# Altium PCB Earpth.PcbDoc
Units mm, origin at the board's own origin, x right, y up, seen from the top; angles counter-clockwise.
Board outline 304.55 x 254.25 mm, 2 copper layers (TopLayer, BottomLayer); 6 components, 2 nets, 96 pads, 12 vias.
Unrouted connection lines stored in the file: 4.
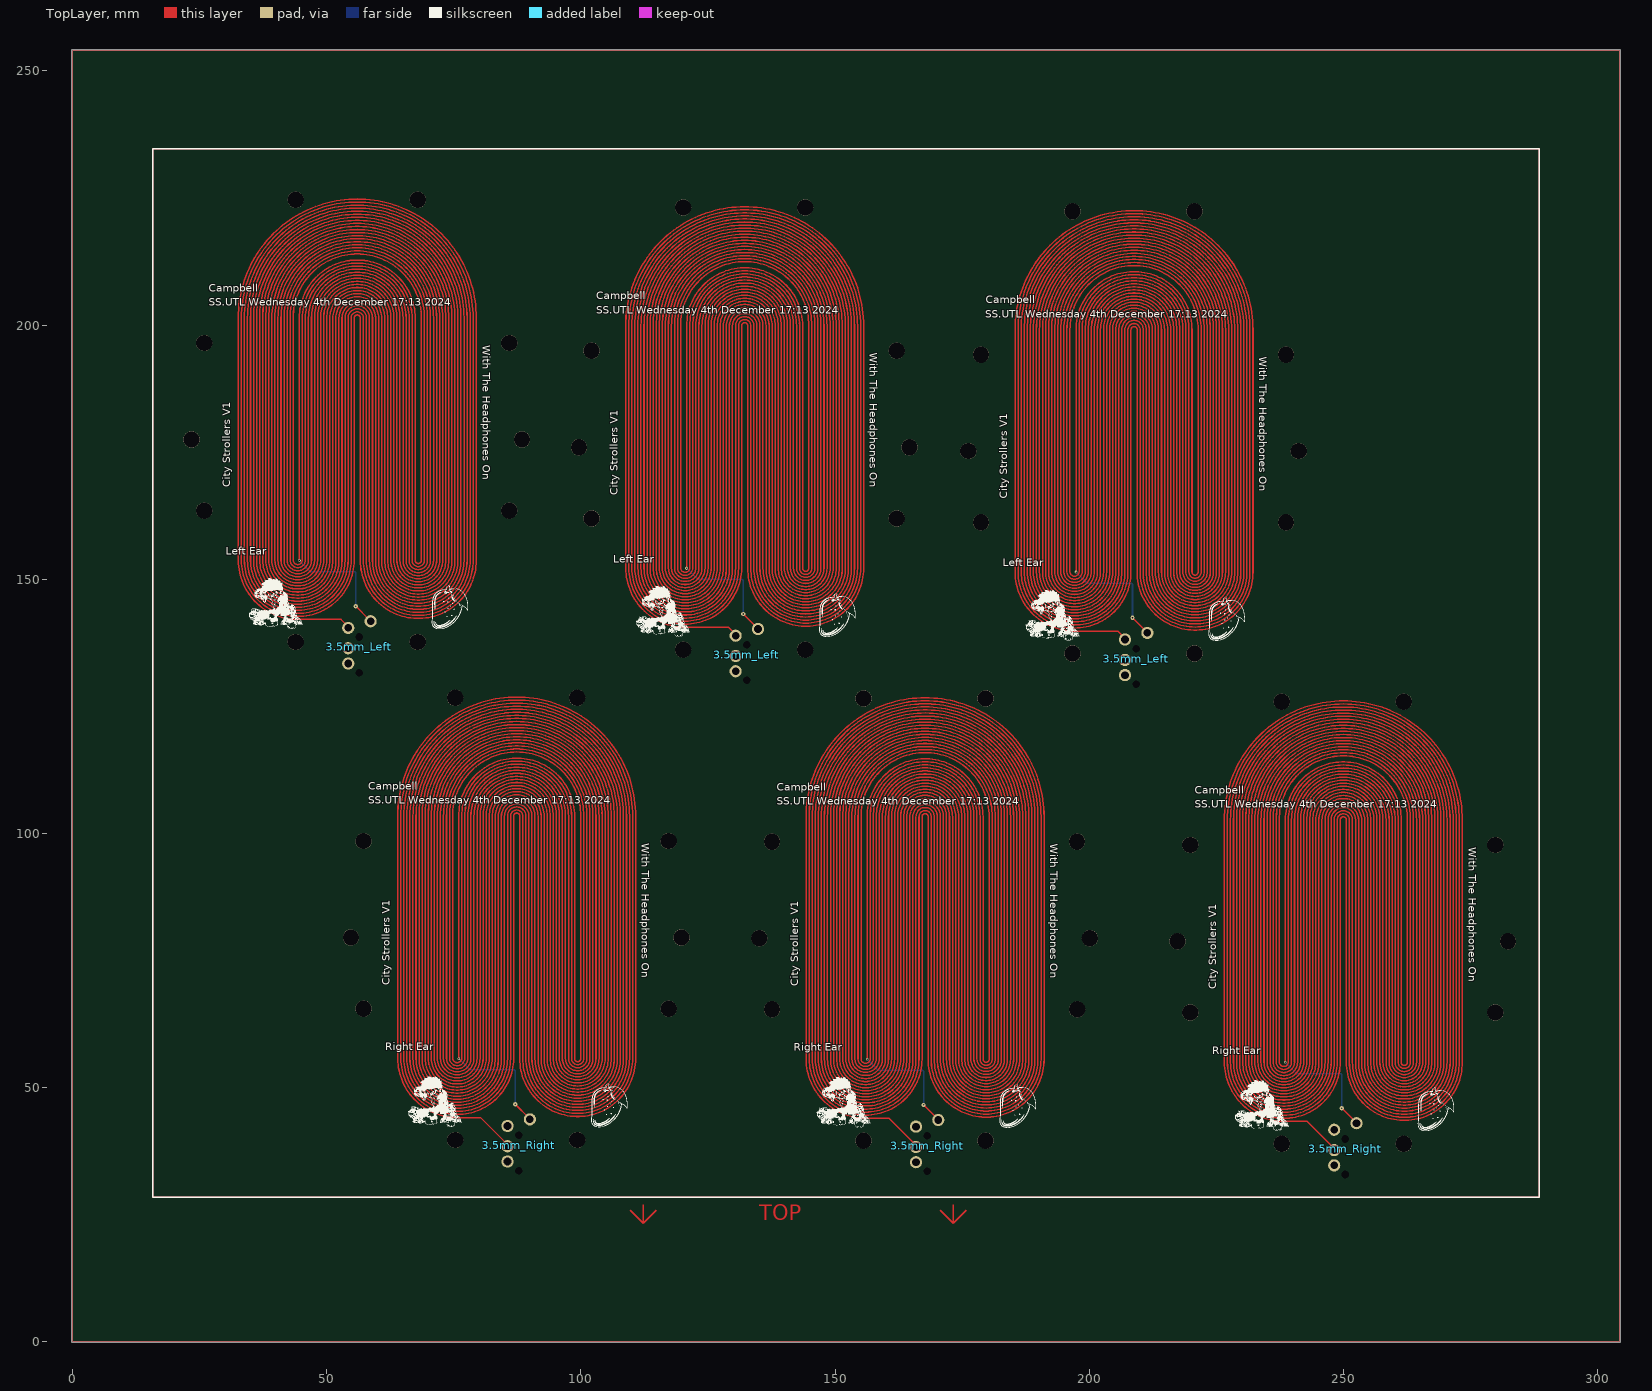
[diagram p0: TopLayer view]
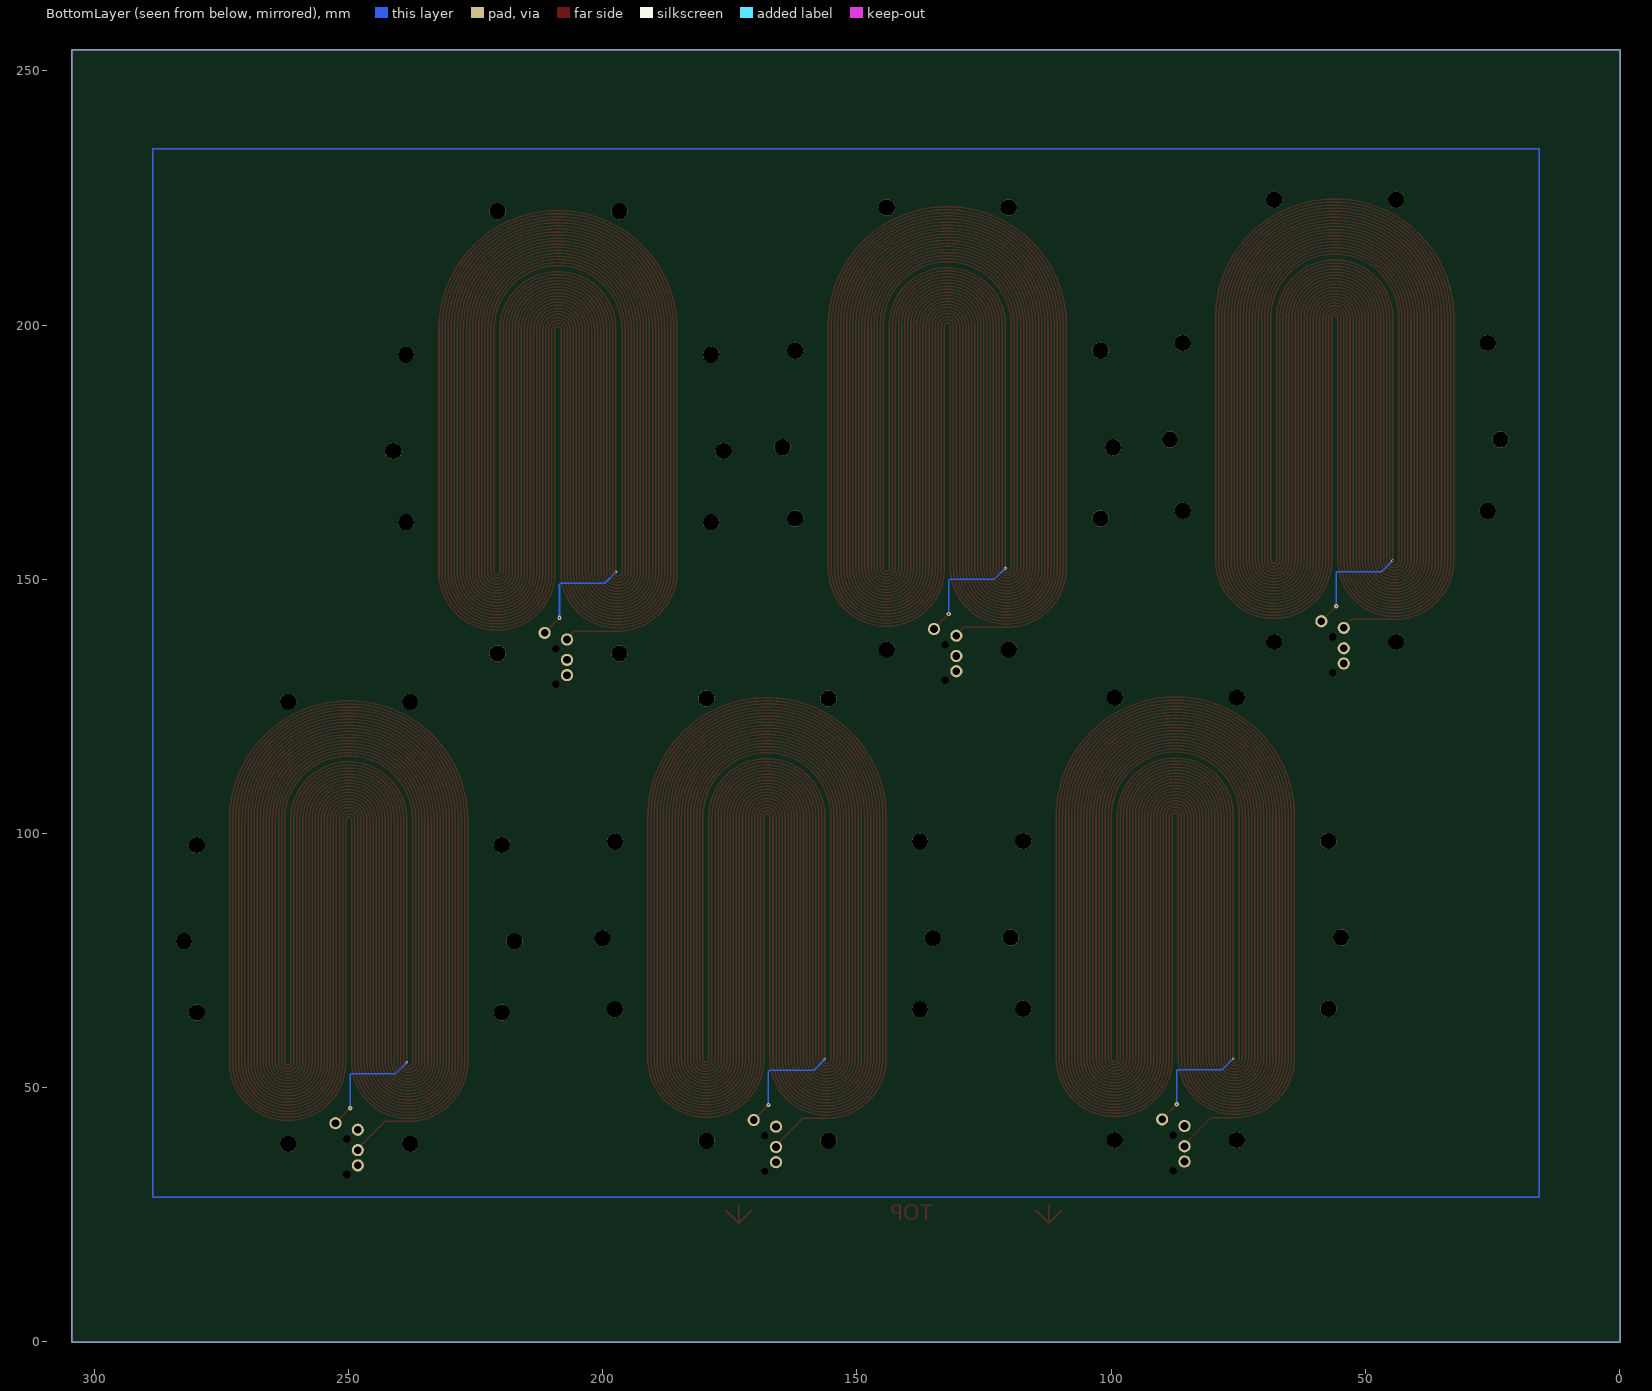
[diagram p1: BottomLayer view, seen from below]

## Layer stack, top to bottom
TopSolder: solder mask 0.0102, Solder Resist, Dk 3.5
TopLayer: signal copper 0.0356
Dielectric1: dielectric 0.32, FR-4, Dk 4.8
BottomLayer: signal copper 0.0356
BottomSolder: solder mask 0.0102, Solder Resist, Dk 3.5

## Board outline
-0.127,-0.127 304.419,-0.127 304.419,254.127 -0.127,254.127

## Design rules (kind name [scope] priority, off if disabled: settings)
Clearance [All] p1: gap=0.508 ignorepadtopadclearanceinfootprint=FALSE except(0: Arc-Hole Track-Hole SMDPad-Hole THPad-Hole Via-Hole Fill-Hole Poly-Hole Region-Hole Text-Hole)
FabricationTestPointUsage TestPointUsage [All] p1: valid=0 allowmultiple=FALSE
FabricationTestpoint Testpoint [All] p1: side=3 testpointundercomponent=TRUE minsize=1.016 maxsize=2.54 preferedsize=1.524 minholesize=0.508 maxholesize=1.016 preferedholesize=0.813 testpointgrid=0.025 allowsidetop=TRUE allowsidebottom=TRUE usegrid=TRUE gridtolerance=0
PolygonConnect [All] p1: connectstyle=Relief reliefconductorwidth=0.254 reliefentries=4 polygonreliefangle="90 Angle" airgapwidth=0.254
RoutingVias [All] p1: holewidth=0.711 width=1.27 viastyle="Through Hole" minholewidth=0.711 minwidth=1.27 maxholewidth=0.711 maxwidth=1.27
SilkToSolderMaskClearance SilkscreenOverComponentPads [IsPad] p1: minsilkscreentomaskgap=0.254 clearancetoexposedcopper=TRUE
SolderMaskExpansion [All] p1: expansion=0.102
Width [All] p1: maxlimit=0.254 minlimit=0.254 preferedwidth=0.254
27 further rules are at their usual default settings.

## Components (designator, comment, footprint, x,y, rotation, side; value= is the part's Value field where it differs from the comment)
3.5mm_Left "PJ-320A" PCBComponent_1 59.44,142.223 r180 top
3.5mm_Left "PJ-320A" PCBComponent_1 135.64,140.699 r180 top
3.5mm_Left "PJ-320A" PCBComponent_1 212.221,139.937 r180 top
3.5mm_Right "PJ-320A" PCBComponent_1 90.774,44.262 r180 top
3.5mm_Right "PJ-320A" PCBComponent_1 171.107,44.135 r180 top
3.5mm_Right "PJ-320A" PCBComponent_1 253.364,43.51 r180 top

## Footprints (in the part's own frame and the unit in brackets; to place one, negate y for a bottom-side part, rotate by r counter-clockwise, add the part's x,y. Pads: shape width x height; smd on the part's side, far side on the other; paste and mask are expansions set on the pad)
PCBComponent_1 [mm]
  round 0 hole 1.5 unplated: 0(3,10.6) 0(3,3.6)
  round 2.4 hole 1.5: 1(0.8,0.5) 2(5.2,1.8) 3(5.2,5.8) 4(5.2,8.8)

## Part data
3.5mm_Left 3.5mm_Left 3.5mm_Left 3.5mm_Right 3.5mm_Right 3.5mm_Right: "A thru hole 3.5mm TRRS audio jack connector"

## Free pads (board coordinates)
  round 3.2 hole 3.2 unplated: 9(23.412,177.482) 9(25.907,196.458) 9(25.912,163.482) 9(43.912,224.635) 9(43.912,137.664) 9(54.767,79.519) 9(57.262,98.494) 9(57.267,65.519) 9(67.912,137.664) 9(67.912,224.635) 9(75.266,126.672) 9(75.267,39.701) 9(85.912,196.458) 9(85.917,163.482) 9(88.417,177.482) 9(99.267,39.701) 9(99.267,126.672) 9(99.612,175.958) 9(102.107,194.934) 9(102.112,161.958) 9(117.267,98.494) 9(117.272,65.519) 9(119.772,79.519) 9(120.112,223.111) 9(120.112,136.14) 9(135.099,79.392) 9(137.595,98.367) 9(137.599,65.392) 9(144.112,136.14) 9(144.112,223.111) 9(155.599,126.545) 9(155.599,39.574) 9(162.112,194.934) 9(162.117,161.958) 9(164.617,175.958) 9(176.193,175.196) 9(178.688,194.172) 9(178.693,161.196) 9(179.599,39.574) 9(179.599,126.545) 9(196.693,222.349) 9(196.693,135.378) 9(197.599,98.367) 9(197.605,65.392) 9(200.105,79.392) 9(217.357,78.767) 9(219.852,97.743) 9(219.857,64.767) 9(220.693,135.378) 9(220.693,222.349) 9(237.856,125.92) 9(237.857,38.949) 9(238.693,194.172) 9(238.698,161.196) 9(241.198,175.196) 9(261.857,38.949) 9(261.857,125.92) 9(279.857,97.743) 9(279.862,64.767) 9(282.362,78.767)

## Via types
v1: diameter 0.85, hole 0.3, TopLayer to BottomLayer, 6 vias
v2: diameter 0.5, hole 0.3, TopLayer to BottomLayer, 3 vias
v3: diameter 0.6, hole 0.3, TopLayer to BottomLayer, 3 vias

## Nets (pads, with @x,y where several pads share a name; then routed paths per layer and width w, separated by ;. In a path a pad name is that pad's centre, name@x,y a point inside that pad or via, vN(x,y) a via of type N, cw(c..) or ccw(c..) an arc to the next point about the centre after c; other vN are vias at no path point)
3.5mm_Left: 3.5mm_Left.1 3.5mm_Left.2 | length 17409.4
  TopLayer w0.3: 32.617,153.682 ccw(c44.317,153.782) 44.327,142.082 52.822,142.082 3.5mm_Left.2@54.204,140.699 ; 32.617,153.682 32.617,201.382 cw(c56.017,201.382) 79.417,201.382 79.417,153.682 cw(c68.017,153.682) 56.617,153.682 56.617,201.382 ccw(c56.017,201.382) 55.417,201.382 55.417,153.682 cw(c44.317,153.782) 33.217,153.682 33.217,201.382 cw(c56.017,201.382) 78.817,201.382 78.817,153.682 cw(c68.017,153.682) 57.217,153.682 57.217,201.382 ccw(c56.017,201.382) 54.817,201.382 54.817,153.682 cw(c44.317,153.782) 33.817,153.682 33.817,201.382 cw(c56.017,201.382) 78.217,201.382 78.217,153.682 cw(c68.017,153.682) 57.817,153.682 57.817,201.382 ccw(c56.017,201.382) 54.217,201.382 54.217,153.682 cw(c44.317,153.782) 34.417,153.682 34.417,201.382 cw(c56.017,201.382) 77.617,201.382 77.617,153.682 cw(c68.017,153.682) 58.417,153.682 58.417,201.382 ccw(c56.017,201.382) 53.617,201.382 53.617,153.682 cw(c44.317,153.782) 35.017,153.682 35.017,201.382 cw(c56.017,201.382) 77.017,201.382 77.017,153.682 cw(c68.017,153.682) 59.017,153.682 59.017,201.382 ccw(c56.017,201.382) 53.017,201.382 53.017,153.682 cw(c44.317,153.782) 35.617,153.682 35.617,201.382 cw(c56.017,201.382) 76.417,201.382 76.417,153.682 cw(c68.017,153.682) 59.617,153.682 59.617,201.382 ccw(c56.017,201.382) 52.417,201.382 52.417,153.682 cw(c44.317,153.782) 36.217,153.682 36.217,201.382 cw(c56.017,201.382) 75.817,201.382 75.817,153.682 cw(c68.017,153.682) 60.217,153.682 60.217,201.382 ccw(c56.017,201.382) 51.817,201.382 51.817,153.682 cw(c44.317,153.782) 36.817,153.682 36.817,201.382 cw(c56.017,201.382) 75.217,201.382 75.217,153.682 cw(c68.017,153.682) 60.817,153.682 60.817,201.382 ccw(c56.017,201.382) 51.217,201.382 51.217,153.682 cw(c44.317,153.782) 37.417,153.682 37.417,201.382 cw(c56.017,201.382) 74.617,201.382 74.617,153.682 cw(c68.017,153.682) 61.417,153.682 61.417,201.382 ccw(c56.017,201.382) 50.617,201.382 50.617,153.682 cw(c44.317,153.782) 38.017,153.682 38.017,201.382 cw(c56.017,201.382) 74.017,201.382 74.017,153.682 cw(c68.017,153.682) 62.017,153.682 62.017,201.382 ccw(c56.017,201.382) 50.017,201.382 50.017,153.682 cw(c44.317,153.782) 38.617,153.682 38.617,201.382 cw(c56.017,201.382) 73.417,201.382 73.417,153.682 cw(c68.017,153.682) 62.617,153.682 62.617,201.382 ccw(c56.017,201.382) 49.417,201.382 49.417,153.682 cw(c44.317,153.782) 39.217,153.682 39.217,201.382 cw(c56.017,201.382) 72.817,201.382 72.817,153.682 cw(c68.017,153.682) 63.217,153.682 63.217,201.382 ccw(c56.017,201.382) 48.817,201.382 48.817,153.682 cw(c44.317,153.782) 39.817,153.682 39.817,201.382 cw(c56.017,201.382) 72.217,201.382 72.217,153.682 cw(c68.017,153.682) 63.817,153.682 63.817,201.382 ccw(c56.017,201.382) 48.217,201.382 48.217,153.682 cw(c44.317,153.782) 40.417,153.682 40.417,201.382 cw(c56.017,201.382) 71.617,201.382 71.617,153.682 cw(c68.017,153.682) 64.417,153.682 64.417,201.382 ccw(c56.017,201.382) 47.617,201.382 47.617,153.682 cw(c44.317,153.782) 41.017,153.682 41.017,201.382 cw(c56.017,201.382) 71.017,201.382 71.017,153.682 cw(c68.017,153.682) 65.017,153.682 65.017,201.382 ccw(c56.017,201.382) 47.017,201.382 47.017,153.682 cw(c44.317,153.782) 41.617,153.682 41.617,201.382 cw(c56.017,201.382) 70.417,201.382 70.417,153.682 cw(c68.017,153.682) 65.617,153.682 65.617,201.382 ccw(c56.017,201.382) 46.417,201.382 46.417,153.682 cw(c44.317,153.782) 42.217,153.682 42.217,201.382 cw(c56.017,201.382) 69.817,201.382 69.817,153.682 cw(c68.017,153.682) 66.217,153.682 66.217,201.382 ccw(c56.017,201.382) 45.817,201.382 45.817,153.682 cw(c44.317,153.782) 42.817,153.682 42.817,201.382 cw(c56.017,201.382) 69.217,201.382 69.217,153.682 cw(c68.017,153.682) 66.817,153.682 66.817,201.382 ccw(c56.017,201.382) 45.217,201.382 45.217,153.682 cw(c44.317,153.782) 43.417,153.682 43.417,201.382 cw(c56.017,201.382) 68.617,201.382 68.617,153.682 cw(c68.017,153.682) 67.417,153.682 67.417,201.382 ccw(c56.017,201.382) 44.617,201.382 v3(44.617,153.682) ; v1(55.717,144.682) 55.744,144.682 58.427,141.999 3.5mm_Left.1@58.604,141.999 ; 108.817,152.158 ccw(c120.517,152.258) 120.527,140.558 129.022,140.558 3.5mm_Left.2@130.404,139.175 ; 108.817,152.158 108.817,199.858 cw(c132.217,199.858) 155.617,199.858 155.617,152.158 cw(c144.217,152.158) 132.817,152.158 132.817,199.858 ccw(c132.217,199.858) 131.617,199.858 131.617,152.158 cw(c120.517,152.258) 109.417,152.158 109.417,199.858 cw(c132.217,199.858) 155.017,199.858 155.017,152.158 cw(c144.217,152.158) 133.417,152.158 133.417,199.858 ccw(c132.217,199.858) 131.017,199.858 131.017,152.158 cw(c120.517,152.258) 110.017,152.158 110.017,199.858 cw(c132.217,199.858) 154.417,199.858 154.417,152.158 cw(c144.217,152.158) 134.017,152.158 134.017,199.858 ccw(c132.217,199.858) 130.417,199.858 130.417,152.158 cw(c120.517,152.258) 110.617,152.158 110.617,199.858 cw(c132.217,199.858) 153.817,199.858 153.817,152.158 cw(c144.217,152.158) 134.617,152.158 134.617,199.858 ccw(c132.217,199.858) 129.817,199.858 129.817,152.158 cw(c120.517,152.258) 111.217,152.158 111.217,199.858 cw(c132.217,199.858) 153.217,199.858 153.217,152.158 cw(c144.217,152.158) 135.217,152.158 135.217,199.858 ccw(c132.217,199.858) 129.217,199.858 129.217,152.158 cw(c120.517,152.258) 111.817,152.158 111.817,199.858 cw(c132.217,199.858) 152.617,199.858 152.617,152.158 cw(c144.217,152.158) 135.817,152.158 135.817,199.858 ccw(c132.217,199.858) 128.617,199.858 128.617,152.158 cw(c120.517,152.258) 112.417,152.158 112.417,199.858 cw(c132.217,199.858) 152.017,199.858 152.017,152.158 cw(c144.217,152.158) 136.417,152.158 136.417,199.858 ccw(c132.217,199.858) 128.017,199.858 128.017,152.158 cw(c120.517,152.258) 113.017,152.158 113.017,199.858 cw(c132.217,199.858) 151.417,199.858 151.417,152.158 cw(c144.217,152.158) 137.017,152.158 137.017,199.858 ccw(c132.217,199.858) 127.417,199.858 127.417,152.158 cw(c120.517,152.258) 113.617,152.158 113.617,199.858 cw(c132.217,199.858) 150.817,199.858 150.817,152.158 cw(c144.217,152.158) 137.617,152.158 137.617,199.858 ccw(c132.217,199.858) 126.817,199.858 126.817,152.158 cw(c120.517,152.258) 114.217,152.158 114.217,199.858 cw(c132.217,199.858) 150.217,199.858 150.217,152.158 cw(c144.217,152.158) 138.217,152.158 138.217,199.858 ccw(c132.217,199.858) 126.217,199.858 126.217,152.158 cw(c120.517,152.258) 114.817,152.158 114.817,199.858 cw(c132.217,199.858) 149.617,199.858 149.617,152.158 cw(c144.217,152.158) 138.817,152.158 138.817,199.858 ccw(c132.217,199.858) 125.617,199.858 125.617,152.158 cw(c120.517,152.258) 115.417,152.158 115.417,199.858 cw(c132.217,199.858) 149.017,199.858 149.017,152.158 cw(c144.217,152.158) 139.417,152.158 139.417,199.858 ccw(c132.217,199.858) 125.017,199.858 125.017,152.158 cw(c120.517,152.258) 116.017,152.158 116.017,199.858 cw(c132.217,199.858) 148.417,199.858 148.417,152.158 cw(c144.217,152.158) 140.017,152.158 140.017,199.858 ccw(c132.217,199.858) 124.417,199.858 124.417,152.158 cw(c120.517,152.258) 116.617,152.158 116.617,199.858 cw(c132.217,199.858) 147.817,199.858 147.817,152.158 cw(c144.217,152.158) 140.617,152.158 140.617,199.858 ccw(c132.217,199.858) 123.817,199.858 123.817,152.158 cw(c120.517,152.258) 117.217,152.158 117.217,199.858 cw(c132.217,199.858) 147.217,199.858 147.217,152.158 cw(c144.217,152.158) 141.217,152.158 141.217,199.858 ccw(c132.217,199.858) 123.217,199.858 123.217,152.158 cw(c120.517,152.258) 117.817,152.158 117.817,199.858 cw(c132.217,199.858) 146.617,199.858 146.617,152.158 cw(c144.217,152.158) 141.817,152.158 141.817,199.858 ccw(c132.217,199.858) 122.617,199.858 122.617,152.158 cw(c120.517,152.258) 118.417,152.158 118.417,199.858 cw(c132.217,199.858) 146.017,199.858 146.017,152.158 cw(c144.217,152.158) 142.417,152.158 142.417,199.858 ccw(c132.217,199.858) 122.017,199.858 122.017,152.158 cw(c120.517,152.258) 119.017,152.158 119.017,199.858 cw(c132.217,199.858) 145.417,199.858 145.417,152.158 cw(c144.217,152.158) 143.017,152.158 143.017,199.858 ccw(c132.217,199.858) 121.417,199.858 121.417,152.158 cw(c120.517,152.258) 119.617,152.158 119.617,199.858 cw(c132.217,199.858) 144.817,199.858 144.817,152.158 cw(c144.217,152.158) 143.617,152.158 143.617,199.858 ccw(c132.217,199.858) 120.817,199.858 v3(120.817,152.158) ; v1(131.917,143.158) 131.944,143.158 134.627,140.475 3.5mm_Left.1@134.804,140.475 ; 185.398,151.396 ccw(c197.098,151.496) 197.108,139.796 205.603,139.796 3.5mm_Left.2@206.985,138.413 ; 185.398,151.396 185.398,199.096 cw(c208.798,199.096) 232.198,199.096 232.198,151.396 cw(c220.798,151.396) 209.398,151.396 209.398,199.096 ccw(c208.798,199.096) 208.198,199.096 208.198,151.396 cw(c197.098,151.496) 185.998,151.396 185.998,199.096 cw(c208.798,199.096) 231.598,199.096 231.598,151.396 cw(c220.798,151.396) 209.998,151.396 209.998,199.096 ccw(c208.798,199.096) 207.598,199.096 207.598,151.396 cw(c197.098,151.496) 186.598,151.396 186.598,199.096 cw(c208.798,199.096) 230.998,199.096 230.998,151.396 cw(c220.798,151.396) 210.598,151.396 210.598,199.096 ccw(c208.798,199.096) 206.998,199.096 206.998,151.396 cw(c197.098,151.496) 187.198,151.396 187.198,199.096 cw(c208.798,199.096) 230.398,199.096 230.398,151.396 cw(c220.798,151.396) 211.198,151.396 211.198,199.096 ccw(c208.798,199.096) 206.398,199.096 206.398,151.396 cw(c197.098,151.496) 187.798,151.396 187.798,199.096 cw(c208.798,199.096) 229.798,199.096 229.798,151.396 cw(c220.798,151.396) 211.798,151.396 211.798,199.096 ccw(c208.798,199.096) 205.798,199.096 205.798,151.396 cw(c197.098,151.496) 188.398,151.396 188.398,199.096 cw(c208.798,199.096) 229.198,199.096 229.198,151.396 cw(c220.798,151.396) 212.398,151.396 212.398,199.096 ccw(c208.798,199.096) 205.198,199.096 205.198,151.396 cw(c197.098,151.496) 188.998,151.396 188.998,199.096 cw(c208.798,199.096) 228.598,199.096 228.598,151.396 cw(c220.798,151.396) 212.998,151.396 212.998,199.096 ccw(c208.798,199.096) 204.598,199.096 204.598,151.396 cw(c197.098,151.496) 189.598,151.396 189.598,199.096 cw(c208.798,199.096) 227.998,199.096 227.998,151.396 cw(c220.798,151.396) 213.598,151.396 213.598,199.096 ccw(c208.798,199.096) 203.998,199.096 203.998,151.396 cw(c197.098,151.496) 190.198,151.396 190.198,199.096 cw(c208.798,199.096) 227.398,199.096 227.398,151.396 cw(c220.798,151.396) 214.198,151.396 214.198,199.096 ccw(c208.798,199.096) 203.398,199.096 203.398,151.396 cw(c197.098,151.496) 190.798,151.396 190.798,199.096 cw(c208.798,199.096) 226.798,199.096 226.798,151.396 cw(c220.798,151.396) 214.798,151.396 214.798,199.096 ccw(c208.798,199.096) 202.798,199.096 202.798,151.396 cw(c197.098,151.496) 191.398,151.396 191.398,199.096 cw(c208.798,199.096) 226.198,199.096 226.198,151.396 cw(c220.798,151.396) 215.398,151.396 215.398,199.096 ccw(c208.798,199.096) 202.198,199.096 202.198,151.396 cw(c197.098,151.496) 191.998,151.396 191.998,199.096 cw(c208.798,199.096) 225.598,199.096 225.598,151.396 cw(c220.798,151.396) 215.998,151.396 215.998,199.096 ccw(c208.798,199.096) 201.598,199.096 201.598,151.396 cw(c197.098,151.496) 192.598,151.396 192.598,199.096 cw(c208.798,199.096) 224.998,199.096 224.998,151.396 cw(c220.798,151.396) 216.598,151.396 216.598,199.096 ccw(c208.798,199.096) 200.998,199.096 200.998,151.396 cw(c197.098,151.496) 193.198,151.396 193.198,199.096 cw(c208.798,199.096) 224.398,199.096 224.398,151.396 cw(c220.798,151.396) 217.198,151.396 217.198,199.096 ccw(c208.798,199.096) 200.398,199.096 200.398,151.396 cw(c197.098,151.496) 193.798,151.396 193.798,199.096 cw(c208.798,199.096) 223.798,199.096 223.798,151.396 cw(c220.798,151.396) 217.798,151.396 217.798,199.096 ccw(c208.798,199.096) 199.798,199.096 199.798,151.396 cw(c197.098,151.496) 194.398,151.396 194.398,199.096 cw(c208.798,199.096) 223.198,199.096 223.198,151.396 cw(c220.798,151.396) 218.398,151.396 218.398,199.096 ccw(c208.798,199.096) 199.198,199.096 199.198,151.396 cw(c197.098,151.496) 194.998,151.396 194.998,199.096 cw(c208.798,199.096) 222.598,199.096 222.598,151.396 cw(c220.798,151.396) 218.998,151.396 218.998,199.096 ccw(c208.798,199.096) 198.598,199.096 198.598,151.396 cw(c197.098,151.496) 195.598,151.396 195.598,199.096 cw(c208.798,199.096) 221.998,199.096 221.998,151.396 cw(c220.798,151.396) 219.598,151.396 219.598,199.096 ccw(c208.798,199.096) 197.998,199.096 197.998,151.396 cw(c197.098,151.496) 196.198,151.396 196.198,199.096 cw(c208.798,199.096) 221.398,199.096 221.398,151.396 cw(c220.798,151.396) 220.198,151.396 220.198,199.096 ccw(c208.798,199.096) 197.398,199.096 v3(197.398,151.396) ; v1(208.498,142.396) 208.525,142.396 211.208,139.713 3.5mm_Left.1@211.385,139.713
  BottomLayer w0.3: v3(44.617,153.682) 46.817,151.482 55.542,151.482 55.717,151.306 v1(55.717,144.682) ; v3(120.817,152.158) 123.017,149.958 131.742,149.958 131.917,149.782 v1(131.917,143.158) ; v3(197.398,151.396) 199.598,149.196 208.323,149.196 208.498,149.02 v1(208.498,142.396)
3.5mm_Right: 3.5mm_Right.1 3.5mm_Right.3 | length 17414.3
  TopLayer w0.3: v2(75.972,55.719) 75.972,103.419 cw(c87.372,103.419) 98.772,103.419 98.772,55.719 ccw(c99.372,55.719) 99.972,55.719 99.972,103.419 ccw(c87.372,103.419) 74.772,103.419 74.772,55.719 ccw(c75.672,55.819) 76.572,55.719 76.572,103.419 cw(c87.372,103.419) 98.172,103.419 98.172,55.719 ccw(c99.372,55.719) 100.572,55.719 100.572,103.419 ccw(c87.372,103.419) 74.172,103.419 74.172,55.719 ccw(c75.672,55.819) 77.172,55.719 77.172,103.419 cw(c87.372,103.419) 97.572,103.419 97.572,55.719 ccw(c99.372,55.719) 101.172,55.719 101.172,103.419 ccw(c87.372,103.419) 73.572,103.419 73.572,55.719 ccw(c75.672,55.819) 77.772,55.719 77.772,103.419 cw(c87.372,103.419) 96.972,103.419 96.972,55.719 ccw(c99.372,55.719) 101.772,55.719 101.772,103.419 ccw(c87.372,103.419) 72.972,103.419 72.972,55.719 ccw(c75.672,55.819) 78.372,55.719 78.372,103.419 cw(c87.372,103.419) 96.372,103.419 96.372,55.719 ccw(c99.372,55.719) 102.372,55.719 102.372,103.419 ccw(c87.372,103.419) 72.372,103.419 72.372,55.719 ccw(c75.672,55.819) 78.972,55.719 78.972,103.419 cw(c87.372,103.419) 95.772,103.419 95.772,55.719 ccw(c99.372,55.719) 102.972,55.719 102.972,103.419 ccw(c87.372,103.419) 71.772,103.419 71.772,55.719 ccw(c75.672,55.819) 79.572,55.719 79.572,103.419 cw(c87.372,103.419) 95.172,103.419 95.172,55.719 ccw(c99.372,55.719) 103.572,55.719 103.572,103.419 ccw(c87.372,103.419) 71.172,103.419 71.172,55.719 ccw(c75.672,55.819) 80.172,55.719 80.172,103.419 cw(c87.372,103.419) 94.572,103.419 94.572,55.719 ccw(c99.372,55.719) 104.172,55.719 104.172,103.419 ccw(c87.372,103.419) 70.572,103.419 70.572,55.719 ccw(c75.672,55.819) 80.772,55.719 80.772,103.419 cw(c87.372,103.419) 93.972,103.419 93.972,55.719 ccw(c99.372,55.719) 104.772,55.719 104.772,103.419 ccw(c87.372,103.419) 69.972,103.419 69.972,55.719 ccw(c75.672,55.819) 81.372,55.719 81.372,103.419 cw(c87.372,103.419) 93.372,103.419 93.372,55.719 ccw(c99.372,55.719) 105.372,55.719 105.372,103.419 ccw(c87.372,103.419) 69.372,103.419 69.372,55.719 ccw(c75.672,55.819) 81.972,55.719 81.972,103.419 cw(c87.372,103.419) 92.772,103.419 92.772,55.719 ccw(c99.372,55.719) 105.972,55.719 105.972,103.419 ccw(c87.372,103.419) 68.772,103.419 68.772,55.719 ccw(c75.672,55.819) 82.572,55.719 82.572,103.419 cw(c87.372,103.419) 92.172,103.419 92.172,55.719 ccw(c99.372,55.719) 106.572,55.719 106.572,103.419 ccw(c87.372,103.419) 68.172,103.419 68.172,55.719 ccw(c75.672,55.819) 83.172,55.719 83.172,103.419 cw(c87.372,103.419) 91.572,103.419 91.572,55.719 ccw(c99.372,55.719) 107.172,55.719 107.172,103.419 ccw(c87.372,103.419) 67.572,103.419 67.572,55.719 ccw(c75.672,55.819) 83.772,55.719 83.772,103.419 cw(c87.372,103.419) 90.972,103.419 90.972,55.719 ccw(c99.372,55.719) 107.772,55.719 107.772,103.419 ccw(c87.372,103.419) 66.972,103.419 66.972,55.719 ccw(c75.672,55.819) 84.372,55.719 84.372,103.419 cw(c87.372,103.419) 90.372,103.419 90.372,55.719 ccw(c99.372,55.719) 108.372,55.719 108.372,103.419 ccw(c87.372,103.419) 66.372,103.419 66.372,55.719 ccw(c75.672,55.819) 84.972,55.719 84.972,103.419 cw(c87.372,103.419) 89.772,103.419 89.772,55.719 ccw(c99.372,55.719) 108.972,55.719 108.972,103.419 ccw(c87.372,103.419) 65.772,103.419 65.772,55.719 ccw(c75.672,55.819) 85.572,55.719 85.572,103.419 cw(c87.372,103.419) 89.172,103.419 89.172,55.719 ccw(c99.372,55.719) 109.572,55.719 109.572,103.419 ccw(c87.372,103.419) 65.172,103.419 65.172,55.719 ccw(c75.672,55.819) 86.172,55.719 86.172,103.419 cw(c87.372,103.419) 88.572,103.419 88.572,55.719 ccw(c99.372,55.719) 110.172,55.719 110.172,103.419 ccw(c87.372,103.419) 64.572,103.419 64.572,55.719 ccw(c75.672,55.819) 86.772,55.719 86.772,103.419 cw(c87.372,103.419) 87.972,103.419 87.972,55.719 ccw(c99.372,55.719) 110.772,55.719 110.772,103.419 ccw(c87.372,103.419) 63.972,103.419 63.972,55.719 ccw(c75.672,55.819) 75.681,44.118 80.263,44.118 3.5mm_Right.3@85.574,38.808 ; v1(87.072,46.719) 87.099,46.719 89.782,44.036 3.5mm_Right.1@89.959,44.036 ; v2(156.305,55.592) 156.305,103.292 cw(c167.705,103.292) 179.105,103.292 179.105,55.592 ccw(c179.705,55.592) 180.305,55.592 180.305,103.292 ccw(c167.705,103.292) 155.105,103.292 155.105,55.592 ccw(c156.005,55.692) 156.905,55.592 156.905,103.292 cw(c167.705,103.292) 178.505,103.292 178.505,55.592 ccw(c179.705,55.592) 180.905,55.592 180.905,103.292 ccw(c167.705,103.292) 154.505,103.292 154.505,55.592 ccw(c156.005,55.692) 157.505,55.592 157.505,103.292 cw(c167.705,103.292) 177.905,103.292 177.905,55.592 ccw(c179.705,55.592) 181.505,55.592 181.505,103.292 ccw(c167.705,103.292) 153.905,103.292 153.905,55.592 ccw(c156.005,55.692) 158.105,55.592 158.105,103.292 cw(c167.705,103.292) 177.305,103.292 177.305,55.592 ccw(c179.705,55.592) 182.105,55.592 182.105,103.292 ccw(c167.705,103.292) 153.305,103.292 153.305,55.592 ccw(c156.005,55.692) 158.705,55.592 158.705,103.292 cw(c167.705,103.292) 176.705,103.292 176.705,55.592 ccw(c179.705,55.592) 182.705,55.592 182.705,103.292 ccw(c167.705,103.292) 152.705,103.292 152.705,55.592 ccw(c156.005,55.692) 159.305,55.592 159.305,103.292 cw(c167.705,103.292) 176.105,103.292 176.105,55.592 ccw(c179.705,55.592) 183.305,55.592 183.305,103.292 ccw(c167.705,103.292) 152.105,103.292 152.105,55.592 ccw(c156.005,55.692) 159.905,55.592 159.905,103.292 cw(c167.705,103.292) 175.505,103.292 175.505,55.592 ccw(c179.705,55.592) 183.905,55.592 183.905,103.292 ccw(c167.705,103.292) 151.505,103.292 151.505,55.592 ccw(c156.005,55.692) 160.505,55.592 160.505,103.292 cw(c167.705,103.292) 174.905,103.292 174.905,55.592 ccw(c179.705,55.592) 184.505,55.592 184.505,103.292 ccw(c167.705,103.292) 150.905,103.292 150.905,55.592 ccw(c156.005,55.692) 161.105,55.592 161.105,103.292 cw(c167.705,103.292) 174.305,103.292 174.305,55.592 ccw(c179.705,55.592) 185.105,55.592 185.105,103.292 ccw(c167.705,103.292) 150.305,103.292 150.305,55.592 ccw(c156.005,55.692) 161.705,55.592 161.705,103.292 cw(c167.705,103.292) 173.705,103.292 173.705,55.592 ccw(c179.705,55.592) 185.705,55.592 185.705,103.292 ccw(c167.705,103.292) 149.705,103.292 149.705,55.592 ccw(c156.005,55.692) 162.305,55.592 162.305,103.292 cw(c167.705,103.292) 173.105,103.292 173.105,55.592 ccw(c179.705,55.592) 186.305,55.592 186.305,103.292 ccw(c167.705,103.292) 149.105,103.292 149.105,55.592 ccw(c156.005,55.692) 162.905,55.592 162.905,103.292 cw(c167.705,103.292) 172.505,103.292 172.505,55.592 ccw(c179.705,55.592) 186.905,55.592 186.905,103.292 ccw(c167.705,103.292) 148.505,103.292 148.505,55.592 ccw(c156.005,55.692) 163.505,55.592 163.505,103.292 cw(c167.705,103.292) 171.905,103.292 171.905,55.592 ccw(c179.705,55.592) 187.505,55.592 187.505,103.292 ccw(c167.705,103.292) 147.905,103.292 147.905,55.592 ccw(c156.005,55.692) 164.105,55.592 164.105,103.292 cw(c167.705,103.292) 171.305,103.292 171.305,55.592 ccw(c179.705,55.592) 188.105,55.592 188.105,103.292 ccw(c167.705,103.292) 147.305,103.292 147.305,55.592 ccw(c156.005,55.692) 164.705,55.592 164.705,103.292 cw(c167.705,103.292) 170.705,103.292 170.705,55.592 ccw(c179.705,55.592) 188.705,55.592 188.705,103.292 ccw(c167.705,103.292) 146.705,103.292 146.705,55.592 ccw(c156.005,55.692) 165.305,55.592 165.305,103.292 cw(c167.705,103.292) 170.105,103.292 170.105,55.592 ccw(c179.705,55.592) 189.305,55.592 189.305,103.292 ccw(c167.705,103.292) 146.105,103.292 146.105,55.592 ccw(c156.005,55.692) 165.905,55.592 165.905,103.292 cw(c167.705,103.292) 169.505,103.292 169.505,55.592 ccw(c179.705,55.592) 189.905,55.592 189.905,103.292 ccw(c167.705,103.292) 145.505,103.292 145.505,55.592 ccw(c156.005,55.692) 166.505,55.592 166.505,103.292 cw(c167.705,103.292) 168.905,103.292 168.905,55.592 ccw(c179.705,55.592) 190.505,55.592 190.505,103.292 ccw(c167.705,103.292) 144.905,103.292 144.905,55.592 ccw(c156.005,55.692) 167.105,55.592 167.105,103.292 cw(c167.705,103.292) 168.305,103.292 168.305,55.592 ccw(c179.705,55.592) 191.105,55.592 191.105,103.292 ccw(c167.705,103.292) 144.305,103.292 144.305,55.592 ccw(c156.005,55.692) 156.014,43.991 160.596,43.991 3.5mm_Right.3@165.907,38.681 ; v1(167.405,46.592) 167.432,46.592 170.115,43.909 3.5mm_Right.1@170.292,43.909 ; v2(238.562,54.967) 238.562,102.667 cw(c249.962,102.667) 261.362,102.667 261.362,54.967 ccw(c261.962,54.967) 262.562,54.967 262.562,102.667 ccw(c249.962,102.667) 237.362,102.667 237.362,54.967 ccw(c238.262,55.067) 239.162,54.967 239.162,102.667 cw(c249.962,102.667) 260.762,102.667 260.762,54.967 ccw(c261.962,54.967) 263.162,54.967 263.162,102.667 ccw(c249.962,102.667) 236.762,102.667 236.762,54.967 ccw(c238.262,55.067) 239.762,54.967 239.762,102.667 cw(c249.962,102.667) 260.162,102.667 260.162,54.967 ccw(c261.962,54.967) 263.762,54.967 263.762,102.667 ccw(c249.962,102.667) 236.162,102.667 236.162,54.967 ccw(c238.262,55.067) 240.362,54.967 240.362,102.667 cw(c249.962,102.667) 259.562,102.667 259.562,54.967 ccw(c261.962,54.967) 264.362,54.967 264.362,102.667 ccw(c249.962,102.667) 235.562,102.667 235.562,54.967 ccw(c238.262,55.067) 240.962,54.967 240.962,102.667 cw(c249.962,102.667) 258.962,102.667 258.962,54.967 ccw(c261.962,54.967) 264.962,54.967 264.962,102.667 ccw(c249.962,102.667) 234.962,102.667 234.962,54.967 ccw(c238.262,55.067) 241.562,54.967 241.562,102.667 cw(c249.962,102.667) 258.362,102.667 258.362,54.967 ccw(c261.962,54.967) 265.562,54.967 265.562,102.667 ccw(c249.962,102.667) 234.362,102.667 234.362,54.967 ccw(c238.262,55.067) 242.162,54.967 242.162,102.667 cw(c249.962,102.667) 257.762,102.667 257.762,54.967 ccw(c261.962,54.967) 266.162,54.967 266.162,102.667 ccw(c249.962,102.667) 233.762,102.667 233.762,54.967 ccw(c238.262,55.067) 242.762,54.967 242.762,102.667 cw(c249.962,102.667) 257.162,102.667 257.162,54.967 ccw(c261.962,54.967) 266.762,54.967 266.762,102.667 ccw(c249.962,102.667) 233.162,102.667 233.162,54.967 ccw(c238.262,55.067) 243.362,54.967 243.362,102.667 cw(c249.962,102.667) 256.562,102.667 256.562,54.967 ccw(c261.962,54.967) 267.362,54.967 267.362,102.667 ccw(c249.962,102.667) 232.562,102.667 232.562,54.967 ccw(c238.262,55.067) 243.962,54.967 243.962,102.667 cw(c249.962,102.667) 255.962,102.667 255.962,54.967 ccw(c261.962,54.967) 267.962,54.967 267.962,102.667 ccw(c249.962,102.667) 231.962,102.667 231.962,54.967 ccw(c238.262,55.067) 244.562,54.967 244.562,102.667 cw(c249.962,102.667) 255.362,102.667 255.362,54.967 ccw(c261.962,54.967) 268.562,54.967 268.562,102.667 ccw(c249.962,102.667) 231.362,102.667 231.362,54.967 ccw(c238.262,55.067) 245.162,54.967 245.162,102.667 cw(c249.962,102.667) 254.762,102.667 254.762,54.967 ccw(c261.962,54.967) 269.162,54.967 269.162,102.667 ccw(c249.962,102.667) 230.762,102.667 230.762,54.967 ccw(c238.262,55.067) 245.762,54.967 245.762,102.667 cw(c249.962,102.667) 254.162,102.667 254.162,54.967 ccw(c261.962,54.967) 269.762,54.967 269.762,102.667 ccw(c249.962,102.667) 230.162,102.667 230.162,54.967 ccw(c238.262,55.067) 246.362,54.967 246.362,102.667 cw(c249.962,102.667) 253.562,102.667 253.562,54.967 ccw(c261.962,54.967) 270.362,54.967 270.362,102.667 ccw(c249.962,102.667) 229.562,102.667 229.562,54.967 ccw(c238.262,55.067) 246.962,54.967 246.962,102.667 cw(c249.962,102.667) 252.962,102.667 252.962,54.967 ccw(c261.962,54.967) 270.962,54.967 270.962,102.667 ccw(c249.962,102.667) 228.962,102.667 228.962,54.967 ccw(c238.262,55.067) 247.562,54.967 247.562,102.667 cw(c249.962,102.667) 252.362,102.667 252.362,54.967 ccw(c261.962,54.967) 271.562,54.967 271.562,102.667 ccw(c249.962,102.667) 228.362,102.667 228.362,54.967 ccw(c238.262,55.067) 248.162,54.967 248.162,102.667 cw(c249.962,102.667) 251.762,102.667 251.762,54.967 ccw(c261.962,54.967) 272.162,54.967 272.162,102.667 ccw(c249.962,102.667) 227.762,102.667 227.762,54.967 ccw(c238.262,55.067) 248.762,54.967 248.762,102.667 cw(c249.962,102.667) 251.162,102.667 251.162,54.967 ccw(c261.962,54.967) 272.762,54.967 272.762,102.667 ccw(c249.962,102.667) 227.162,102.667 227.162,54.967 ccw(c238.262,55.067) 249.362,54.967 249.362,102.667 cw(c249.962,102.667) 250.562,102.667 250.562,54.967 ccw(c261.962,54.967) 273.362,54.967 273.362,102.667 ccw(c249.962,102.667) 226.562,102.667 226.562,54.967 ccw(c238.262,55.067) 238.271,43.367 242.853,43.367 3.5mm_Right.3@248.164,38.056 ; v1(249.662,45.967) 249.689,45.967 252.372,43.284 3.5mm_Right.1@252.549,43.284
  BottomLayer w0.3: v2(75.972,55.719) 78.172,53.519 86.896,53.519 87.072,53.343 v1(87.072,46.719) ; v2(156.305,55.592) 158.505,53.392 167.229,53.392 167.405,53.216 v1(167.405,46.592) ; v2(238.562,54.967) 240.762,52.767 249.486,52.767 249.662,52.591 v1(249.662,45.967)
pads on no net: 3.5mm_Left.0 3.5mm_Left.3 3.5mm_Left.4 3.5mm_Right.0 3.5mm_Right.2 3.5mm_Right.4
copper on no net: | length 4213.5
  TopLayer w0.254: 14.732,0 304.292,0 304.292,254 0,254 0,0 15.748,0 ; 15.748,54.356 15.748,234.696 288.544,234.696 288.544,28.448 15.748,28.448 15.748,90.932 ; 109.728,25.908 112.268,23.368 ; 112.268,26.924 112.268,23.368 ; 114.808,25.908 112.268,23.368 ; 170.688,25.908 173.228,23.368 ; 173.228,26.924 173.228,23.368 ; 175.768,25.908 173.228,23.368
  BottomLayer w0.254: 0,52.832 0,254 304.292,254 304.292,0 0,0 0,54.864 ; 25.4,28.448 288.544,28.448 288.544,234.696 15.748,234.696 15.748,28.448 28.448,28.448

## Other copper
TopLayer:
  text "TOP" at 135.128,23.876 h3

## Silkscreen, mask and mechanical layers (free items; w line width, h text height)
TopOverlay:
  drawing of 820 lines, arcs and shapes, not listed
  text "Campbell" at 26.819,206.587 h1.52
  text "Campbell" at 103.019,205.063 h1.52
  text "Campbell" at 179.6,204.301 h1.52
  text "SS.UTL Wednesday 4th December 17:13 2024" at 26.797,203.753 h1.52
  text "SS.UTL Wednesday 4th December 17:13 2024" at 102.997,202.229 h1.52
  text "SS.UTL Wednesday 4th December 17:13 2024" at 179.578,201.467 h1.52
  text "With The Headphones On" at 80.651,196.042 h1.52 r270
  text "With The Headphones On" at 156.851,194.518 h1.52 r270
  text "With The Headphones On" at 233.432,193.756 h1.52 r270
  text "City Strollers V1" at 31.055,168.066 h1.52 r90
  text "City Strollers V1" at 107.255,166.542 h1.52 r90
  text "City Strollers V1" at 183.836,165.78 h1.52 r90
  text "Left Ear" at 30.191,154.811 h1.52
  text "Left Ear" at 106.391,153.287 h1.52
  text "Left Ear" at 182.972,152.525 h1.52
  text "Campbell" at 58.177,108.559 h1.52
  text "Campbell" at 138.51,108.432 h1.52
  text "Campbell" at 220.767,107.807 h1.52
  text "SS.UTL Wednesday 4th December 17:13 2024" at 58.152,105.79 h1.52
  text "SS.UTL Wednesday 4th December 17:13 2024" at 138.485,105.663 h1.52
  text "SS.UTL Wednesday 4th December 17:13 2024" at 220.742,105.038 h1.52
  text "With The Headphones On" at 112.006,98.079 h1.52 r270
  text "With The Headphones On" at 192.338,97.952 h1.52 r270
  text "With The Headphones On" at 274.596,97.327 h1.52 r270
  text "City Strollers V1" at 62.41,70.103 h1.52 r90
  text "City Strollers V1" at 142.743,69.976 h1.52 r90
  text "City Strollers V1" at 225,69.351 h1.52 r90
  text "Right Ear" at 61.546,57.356 h1.52
  text "Right Ear" at 141.879,57.229 h1.52
  text "Right Ear" at 224.136,56.604 h1.52
Mechanical1:
  drawing of 870 lines, arcs and shapes, not listed